# EAGLE board bg (EAGLE 7.5.0)
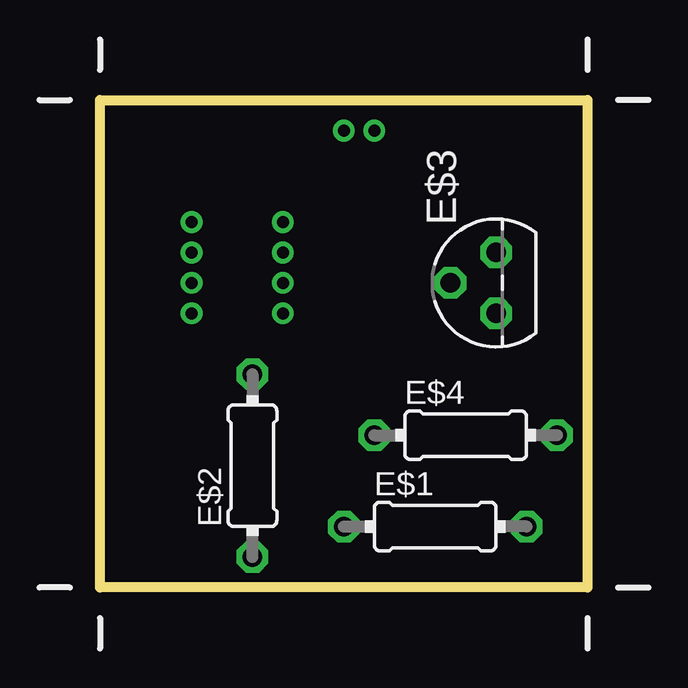
[diagram p0: board, top side]
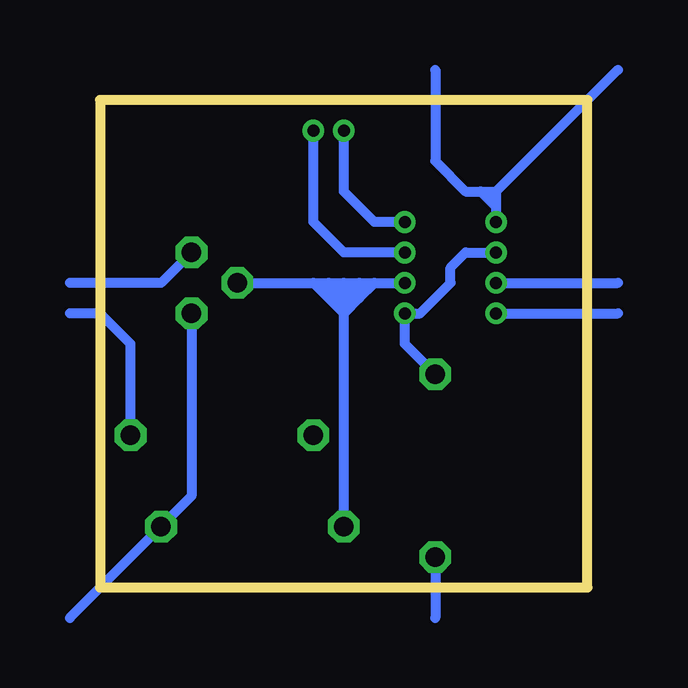
[diagram p1: board, bottom side, seen from below]

Size 20.32 x 20.32 mm. Coordinates in mm from the lower left corner, seen from the top.
Outline: 0,20.32 20.32,20.32 20.32,0 0,0 0,20.32
Copper layers (1*16): Top 0.035mm / dielectric 1.5mm / Bottom 0.035mm
Design rules "default": minimum track width 10mil, minimum drill 24mil, track to track 8mil, track to pad 8mil, pad to pad 8mil, via to via 8mil, smd to smd 8mil, copper to edge 40mil, drill to drill 8mil, minimum pad ring 10mil, minimum via ring 8mil, stop-mask expansion 4mil, vias tented up to drill 0mil, thermal gap 10mil

## Footprints (pad centres in the part's own frame; a part is rotated, then mirrored left to right if it is on the bottom)
0204/7 = drill 0.813 octagon: 1 -3.81,0; 2 3.81,0
TO92 = drill 0.813 octagon: 1 -1.27,0; 2 0,1.905; 3 1.27,0

## Placement (x,y rotation side)
E$1  [0204/7]  13.97,2.54 0 top
E$2  [0204/7]  6.35,5.08 90 top
E$3  [TO92]  16.51,12.7 90 top
E$4  [0204/7]  15.24,6.35 0 top

## Library data of the parts
E$1 E$2 E$4 = eagle-ltspice
E$3 = linear

## Nets
S$1: E$3.3
S$3: E$4.2
S$11: E$1.1 E$3.2
S$12: E$1.2 E$3.1
S$14: E$2.2
S$15: E$2.1

## Tracks (layer width: path | path; a pad name or v marks a point on that pad's centre or on a via)
$11
  pour Bottom: 8.89,12.7 11.43,12.7 10.16,11.43
S$1
  Bottom 0.406: E$3.3 17.78,12.7 21.59,12.7
S$2  (via drill 0.5)
  Bottom 0.406: v3.81,12.7 -1.27,12.7
S$3
  Bottom 0.406: E$4.2 19.05,10.16 20.32,11.43 21.59,11.43
S$4  (via drill 0.5)
  Bottom 0.406: v3.81,11.43 -1.27,11.43
S$5  (via drill 0.5)
  Bottom 0.406: v7.62,15.24 8.89,15.24 10.16,16.51 v10.16,19.05
S$6  (via drill 0.5)
  Bottom 0.406: v7.62,13.97 10.16,13.97 11.43,15.24 v11.43,19.05
S$11  (via drill 0.5)
  Bottom 0.406: E$1.1 10.16,11.43 | 9.53,12.07 8.89,12.7 | 8.89,12.7 v7.62,12.7 | E$3.2 11.43,12.7 | 11.43,12.7 10.79,12.7 | 10.16,12.7 9.53,12.7 | 9.53,12.7 8.89,12.7 | 10.16,11.43 10.79,12.07 | 10.79,12.07 11.43,12.7 | 9.53,12.07 10.16,12.7 | 10.79,12.07 9.53,12.07 | 9.53,12.07 10.16,11.43 | 10.16,11.43 10.16,12.7 | 10.16,12.7 10.79,12.07 | 10.79,12.07 10.79,12.7 | 10.79,12.7 10.16,12.7 | 9.53,12.7 9.53,12.07
S$12
  Bottom 0.406: 21.59,-1.27 E$1.2 16.51,3.81 E$3.1
S$14  (via drill 0.5)
  Bottom 0.406: E$2.2 7.62,10.16 v7.62,11.43 6.98,11.43 5.71,12.7 5.71,13.34 5.08,13.97 v3.81,13.97
S$15
  Bottom 0.406: E$2.1 6.35,-1.27
S$16  (via drill 0.5)
  Bottom 0.406: 6.35,21.59 6.35,17.78 5.08,16.51 4.44,16.51 | -1.27,21.59 3.81,16.51 | 3.81,16.51 3.81,15.88 | 3.81,15.88 v3.81,15.24 | 4.44,16.51 3.81,16.51 | 3.81,15.88 4.44,16.51